# Altium PCB PCB1.PcbDoc
Units mil, origin at the board's own origin, x right, y up, seen from the top; angles counter-clockwise.
Board outline 4330.71 x 4330.71 mil, 2 copper layers (Top Layer, Bottom Layer); 102 components, 122 nets, 276 pads, 0 vias.
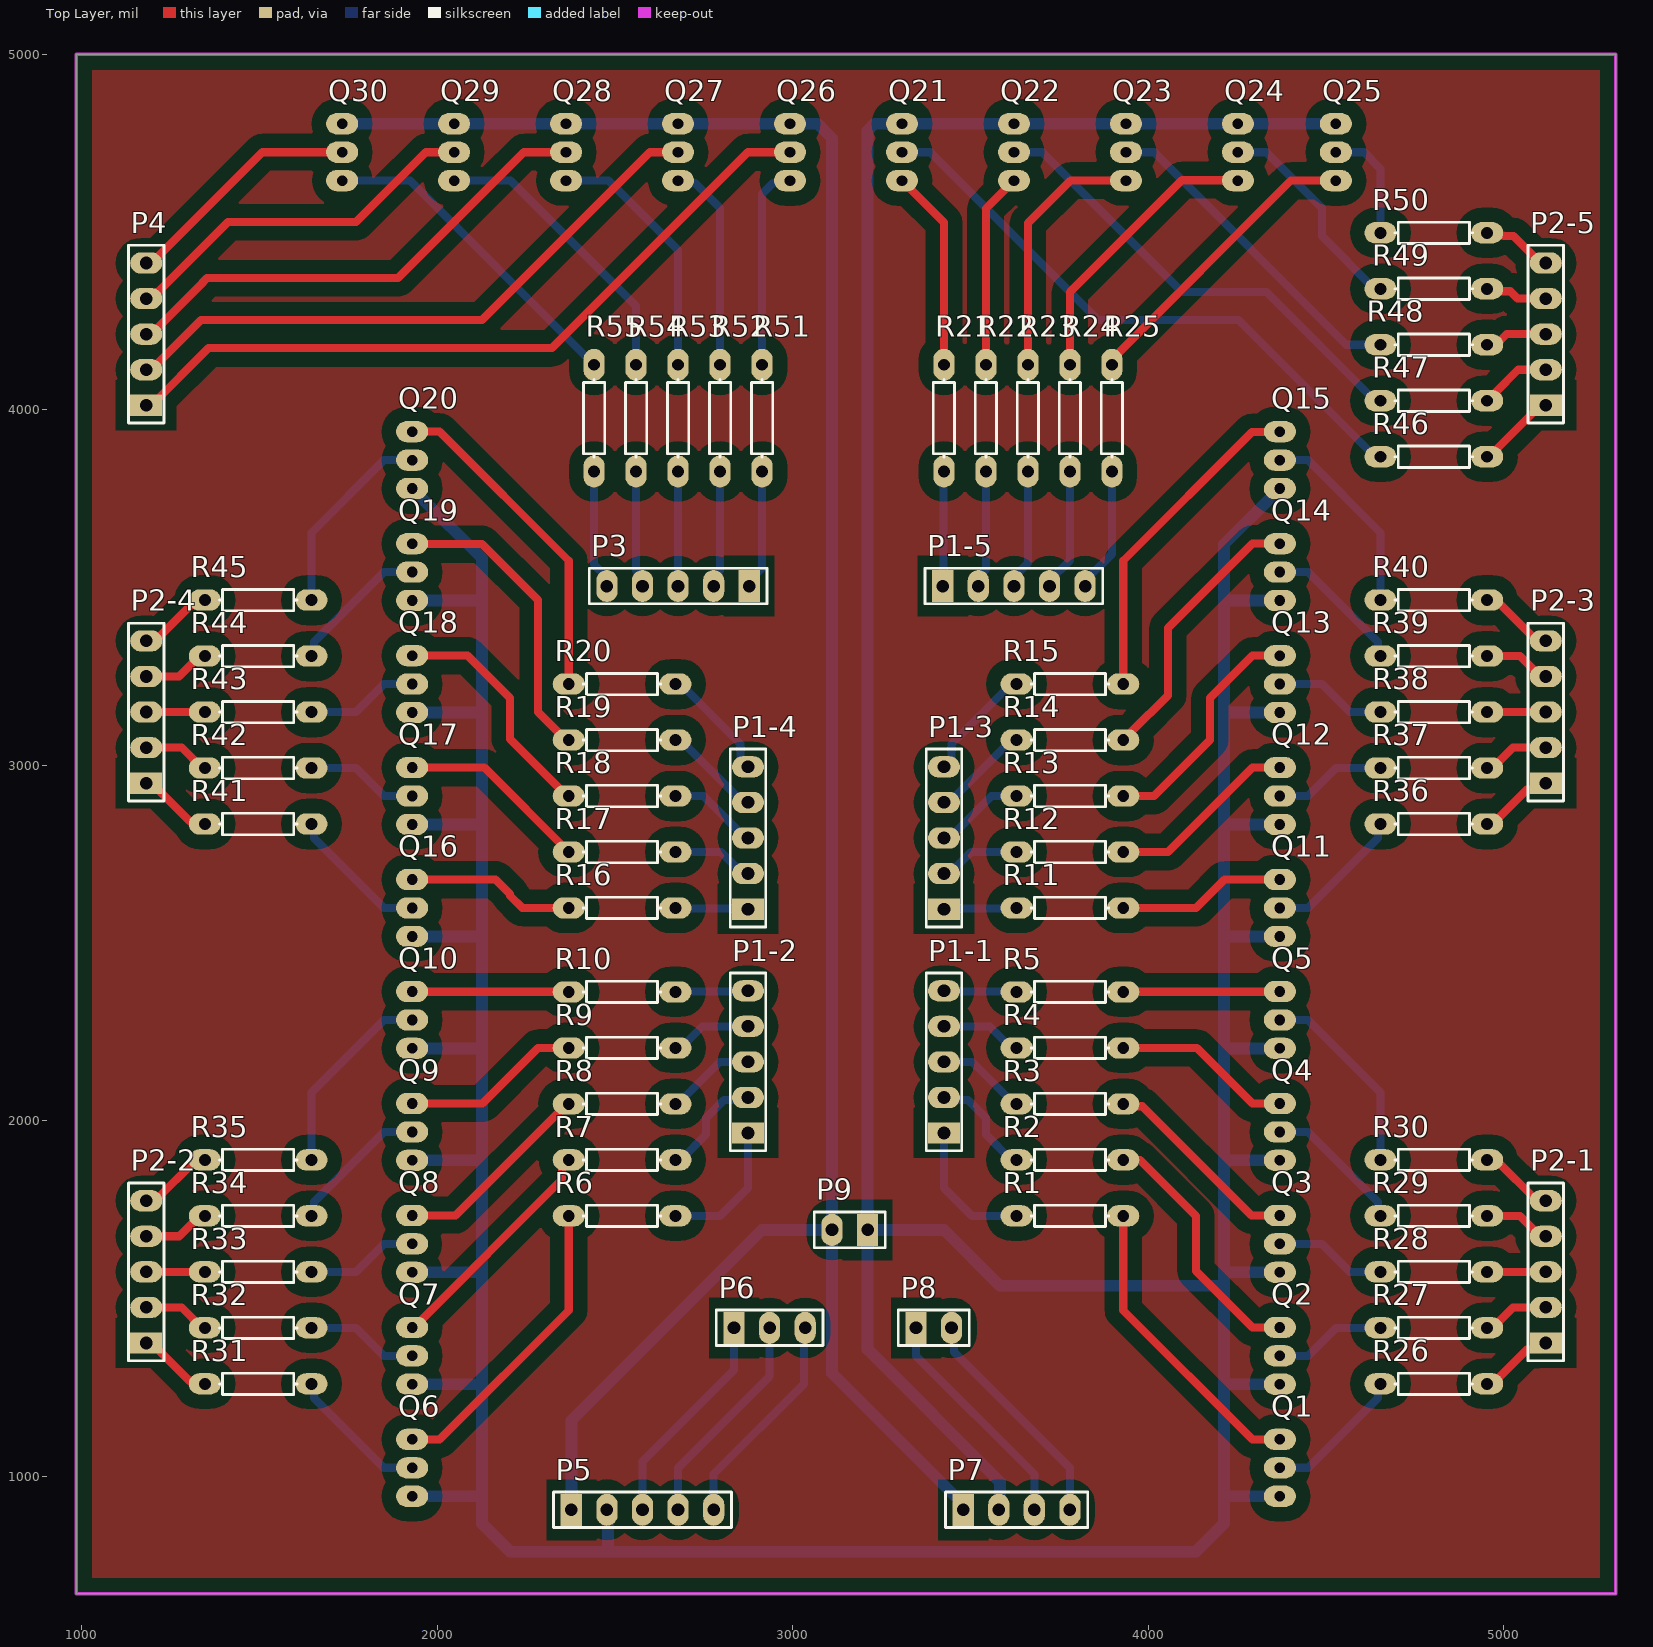
[diagram p0: Top Layer view]
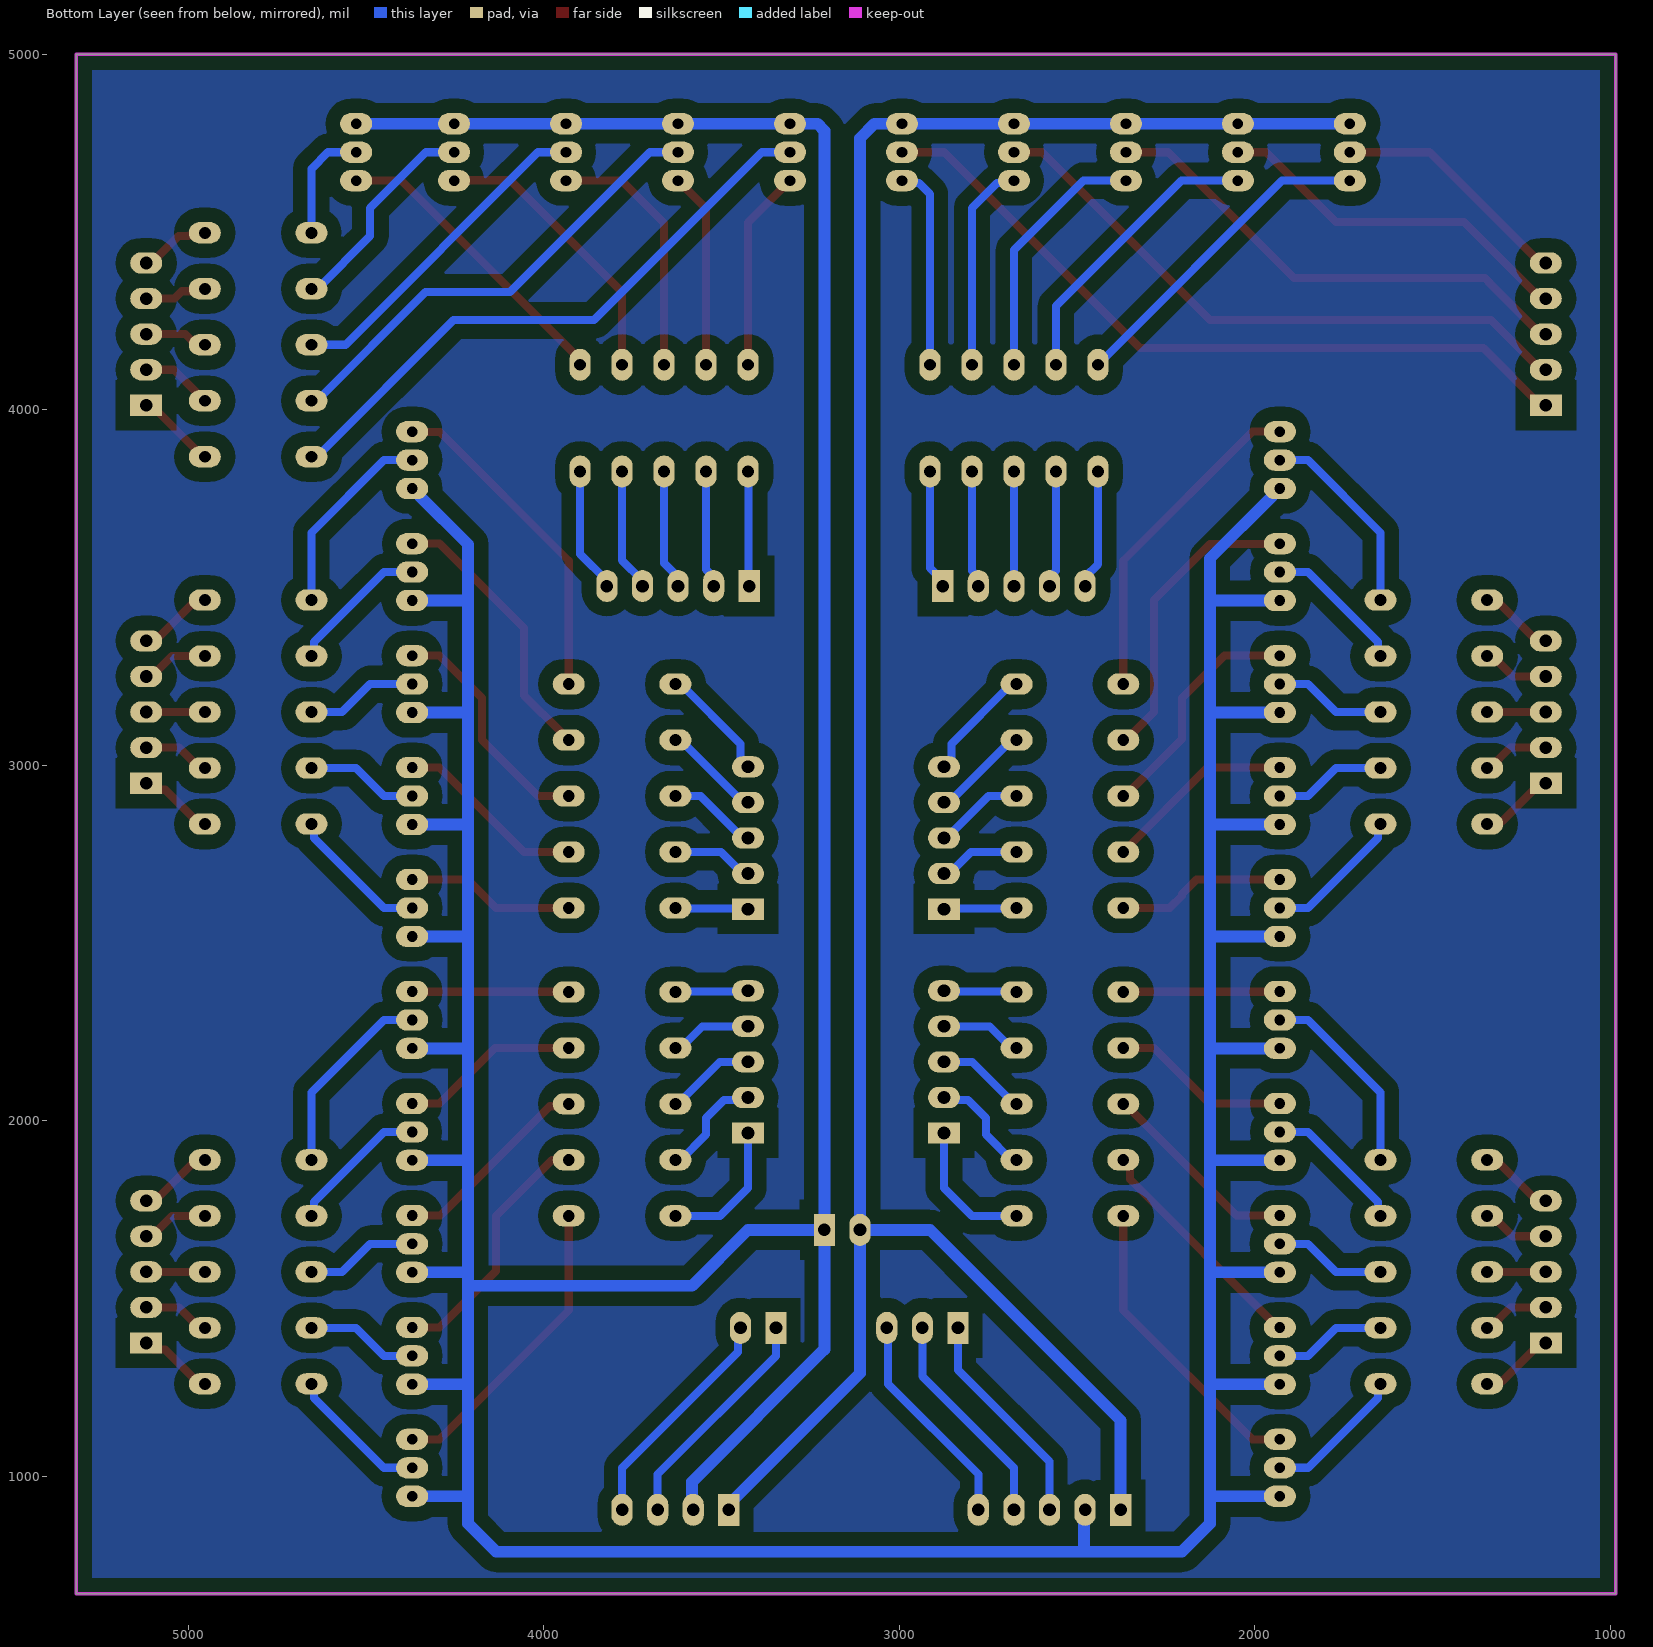
[diagram p1: Bottom Layer view, seen from below]

## Layer stack, top to bottom
Top Solder: solder mask 0.4, Solder Resist, Dk 3.5
Top Layer: signal copper 1.4
Dielectric 1: dielectric 12.6, FR-4, Dk 4.8
Bottom Layer: signal copper 1.4
Bottom Solder: solder mask 0.4, Solder Resist, Dk 3.5

## Board outline
984.25,669.29 984.25,5000 5314.96,5000 5314.96,669.29

## Design rules (kind name [scope] priority, off if disabled: settings)
Clearance poly [InPolygon] p1: gap=40 ignorepadtopadclearanceinfootprint=FALSE
Clearance [All] p2: gap=0 ignorepadtopadclearanceinfootprint=FALSE
PolygonConnect [All] p1: connectstyle=Relief reliefconductorwidth=10 reliefentries=4 polygonreliefangle="90 Angle" airgapwidth=10
RoutingVias [All] p1: holewidth=28 width=50 viastyle="Through Hole" minholewidth=28 minwidth=50 maxholewidth=28 maxwidth=50
SolderMaskExpansion [All] p1: expansion=4
Width Width_VCC [InNet('VCC')] p1: maxlimit=35 minlimit=30 preferedwidth=33 minimp=50.000000 maximp=50.000000 favimp=50.000000
Width Width_GND [InNet('GND')] p2: maxlimit=35 minlimit=30 preferedwidth=33 minimp=50.000000 maximp=50.000000 favimp=50.000000
Width Width_1 [All] p3: maxlimit=25 minlimit=21 preferedwidth=23 minimp=50.000000 maximp=50.000000 favimp=50.000000
30 further rules are at their usual default settings.

## Components (designator, comment, footprint, x,y, rotation, side; value= is the part's Value field where it differs from the comment)
P1-1 "Header 5" HDR1X5 3425.2,1965.35 r90 top
P1-2 "Header 5" HDR1X5 2874.02,1965.35 r90 top
P1-3 "Header 5" HDR1X5 3425.2,2595.28 r90 top
P1-4 "Header 5" HDR1X5 2874.02,2595.28 r90 top
P1-5 "Header 5" HDR1X5 3422.05,3503.94 r0 top
P2-1 "Header 5" HDR1X5 5118.11,1374.8 r90 top
P2-2 "Header 5" HDR1X5 1181.1,1374.8 r90 top
P2-3 "Header 5" HDR1X5 5118.11,2949.61 r90 top
P2-4 "Header 5" HDR1X5 1181.1,2949.61 r90 top
P2-5 "Header 5" HDR1X5 5118.11,4012.6 r90 top
P3 "Header 5" HDR1X5 2877.17,3503.94 r180 top
P4 "Header 5" HDR1X5 1181.1,4012.6 r90 top
P5 "Header 5" HDR1X5 2377.17,905.51 r0 top
P6 "Header 3" HDR1X3 2834.65,1417.32 r0 top
P7 "Header 4" HDR1X4 3479.53,905.51 r0 top
P8 "Header 2" HDR1X2 3346.46,1417.32 r0 top
P9 "Header 2" HDR1X2 3210.24,1692.91 r180 top
Q1 "2N3906" BJT 4310.08,1023.62 r0 top
Q2 "2N3906" BJT 4310.08,1338.58 r0 top
Q3 "2N3906" BJT 4310.08,1653.54 r0 top
Q4 "2N3906" BJT 4310.08,1968.5 r0 top
Q5 "2N3906" BJT 4310.08,2283.46 r0 top
Q6 "2N3906" BJT 1869.13,1023.62 r0 top
Q7 "2N3906" BJT 1869.13,1338.58 r0 top
Q8 "2N3906" BJT 1869.13,1653.54 r0 top
Q9 "2N3906" BJT 1869.13,1968.5 r0 top
Q10 "2N3906" BJT 1869.13,2283.46 r0 top
Q11 "2N3906" BJT 4310.08,2598.43 r0 top
Q12 "2N3906" BJT 4310.08,2913.39 r0 top
Q13 "2N3906" BJT 4310.08,3228.35 r0 top
Q14 "2N3906" BJT 4310.08,3543.31 r0 top
Q15 "2N3906" BJT 4310.08,3858.27 r0 top
Q16 "2N3906" BJT 1869.13,2598.43 r0 top
Q17 "2N3906" BJT 1869.13,2913.39 r0 top
Q18 "2N3906" BJT 1869.13,3228.35 r0 top
Q19 "2N3906" BJT 1869.13,3543.31 r0 top
Q20 "2N3906" BJT 1869.13,3858.27 r0 top
Q21 "2N3906" BJT 3367.09,4724.41 r180 top
Q22 "2N3906" BJT 3682.05,4724.41 r180 top
Q23 "2N3906" BJT 3997.01,4724.41 r180 top
Q24 "2N3906" BJT 4311.97,4724.41 r180 top
Q25 "2N3906" BJT 4587.56,4724.41 r180 top
Q26 "NPN" BJT 3052.13,4724.41 r180 top
Q27 "NPN" BJT 2737.17,4724.41 r180 top
Q28 "NPN" BJT 2422.21,4724.41 r180 top
Q29 "NPN" BJT 2107.24,4724.41 r180 top
Q30 "NPN" BJT 1792.28,4724.41 r180 top
R1 "Res1" AXIAL-0.3 3779.53,1732.28 r0 top value=1K
R2 "Res1" AXIAL-0.3 3779.53,1889.76 r0 top value=1K
R3 "Res1" AXIAL-0.3 3779.53,2047.24 r0 top value=1K
R4 "Res1" AXIAL-0.3 3779.53,2204.72 r0 top value=1K
R5 "Res1" AXIAL-0.3 3779.53,2362.2 r0 top value=1K
R6 "Res1" AXIAL-0.3 2519.69,1732.28 r180 top value=1K
R7 "Res1" AXIAL-0.3 2519.69,1889.76 r180 top value=1K
R8 "Res1" AXIAL-0.3 2519.69,2047.24 r180 top value=1K
R9 "Res1" AXIAL-0.3 2519.69,2204.72 r180 top value=1K
R10 "Res1" AXIAL-0.3 2519.69,2362.2 r180 top value=1K
R11 "Res1" AXIAL-0.3 3779.53,2598.43 r0 top value=1K
R12 "Res1" AXIAL-0.3 3779.53,2755.91 r0 top value=1K
R13 "Res1" AXIAL-0.3 3779.53,2913.39 r0 top value=1K
R14 "Res1" AXIAL-0.3 3779.53,3070.87 r0 top value=1K
R15 "Res1" AXIAL-0.3 3779.53,3228.35 r0 top value=1K
R16 "Res1" AXIAL-0.3 2519.69,2598.43 r180 top value=1K
R17 "Res1" AXIAL-0.3 2519.69,2755.91 r180 top value=1K
R18 "Res1" AXIAL-0.3 2519.69,2913.39 r180 top value=1K
R19 "Res1" AXIAL-0.3 2519.69,3070.87 r180 top value=1K
R20 "Res1" AXIAL-0.3 2519.69,3228.35 r180 top value=1K
R21 "Res1" AXIAL-0.3 3425.2,3976.38 r90 top value=1K
R22 "Res1" AXIAL-0.3 3543.31,3976.38 r90 top value=1K
R23 "Res1" AXIAL-0.3 3661.42,3976.38 r90 top value=1K
R24 "Res1" AXIAL-0.3 3779.53,3976.38 r90 top value=1K
R25 "Res1" AXIAL-0.3 3897.64,3976.38 r90 top value=1K
R26 "Res1" AXIAL-0.3 4803.15,1259.84 r180 top value=330
R27 "Res1" AXIAL-0.3 4803.15,1417.32 r180 top value=330
R28 "Res1" AXIAL-0.3 4803.15,1574.8 r180 top value=330
R29 "Res1" AXIAL-0.3 4803.15,1732.28 r180 top value=330
R30 "Res1" AXIAL-0.3 4803.15,1889.76 r180 top value=330
R31 "Res1" AXIAL-0.3 1496.06,1259.84 r0 top value=330
R32 "Res1" AXIAL-0.3 1496.06,1417.32 r0 top value=330
R33 "Res1" AXIAL-0.3 1496.06,1574.8 r0 top value=330
R34 "Res1" AXIAL-0.3 1496.06,1732.28 r0 top value=330
R35 "Res1" AXIAL-0.3 1496.06,1889.76 r0 top value=330
R36 "Res1" AXIAL-0.3 4803.15,2834.65 r180 top value=330
R37 "Res1" AXIAL-0.3 4803.15,2992.13 r180 top value=330
R38 "Res1" AXIAL-0.3 4803.15,3149.61 r180 top value=330
R39 "Res1" AXIAL-0.3 4803.15,3307.09 r180 top value=330
R40 "Res1" AXIAL-0.3 4803.15,3464.57 r180 top value=330
R41 "Res1" AXIAL-0.3 1496.06,2834.65 r0 top value=330
R42 "Res1" AXIAL-0.3 1496.06,2992.13 r0 top value=330
R43 "Res1" AXIAL-0.3 1496.06,3149.61 r0 top value=330
R44 "Res1" AXIAL-0.3 1496.06,3307.09 r0 top value=330
R45 "Res1" AXIAL-0.3 1496.06,3464.57 r0 top value=330
R46 "Res1" AXIAL-0.3 4803.15,3867.64 r180 top value=330
R47 "Res1" AXIAL-0.3 4803.15,4025.12 r180 top value=330
R48 "Res1" AXIAL-0.3 4803.15,4182.6 r180 top value=330
R49 "Res1" AXIAL-0.3 4803.15,4340.08 r180 top value=330
R50 "Res1" AXIAL-0.3 4803.15,4497.56 r180 top value=330
R51 "Res1" AXIAL-0.3 2913.39,3976.38 r90 top value=1K
R52 "Res1" AXIAL-0.3 2795.28,3976.38 r90 top value=1K
R53 "Res1" AXIAL-0.3 2677.17,3976.38 r90 top value=1K
R54 "Res1" AXIAL-0.3 2559.06,3976.38 r90 top value=1K
R55 "Res1" AXIAL-0.3 2440.94,3976.38 r90 top value=1K

## Footprints (in the part's own frame and the unit in brackets; to place one, negate y for a bottom-side part, rotate by r counter-clockwise, add the part's x,y. Pads: shape width x height; smd on the part's side, far side on the other; paste and mask are expansions set on the pad)
AXIAL-0.3 [mil] "Axial Device, Thru-Hole; 2 Leads; 0.3 in Pin Spacing"
  oval 90x60 hole 33.46: 1(-150,0) 2(150,0)
  silkscreen extent -109,-30 109,30
BJT [mil]
  oval 90x60 hole 30: 1(60,-80) 2(60,0) 3(60,80)
HDR1X2 [mil] "Connector; Header; 2 Position"
  rect 60x90 hole 35.43: 1(0,0)
  oval 60x90 hole 35.43: 2(100,0)
  silkscreen extent -50,-50 150,50
HDR1X3 [mil] "Connector; Header; 3 Position"
  rect 60x90 hole 35.43: 1(0,0)
  oval 60x90 hole 35.43: 2(100,0) 3(200,0)
  silkscreen extent -50,-50 250,50
HDR1X4 [mil] "Connector; Header; 4 Position"
  rect 60x90 hole 35.43: 1(0,0)
  oval 60x90 hole 35.43: 2(100,0) 3(200,0) 4(300,0)
  silkscreen extent -50,-50 350,50
HDR1X5 [mil] "Connector; Header; 5 Position"
  rect 60x90 hole 35.43: 1(0,0)
  oval 60x90 hole 35.43: 2(100,0) 3(200,0) 4(300,0) 5(400,0)
  silkscreen extent -50,-50 450,50

## Part data
P1-1 P1-2 P1-3 P1-4 P1-5 P2-1 P2-2 P2-3 P2-4 P2-5 P3 P4 P5: "Header, 5-Pin", LatestRevisionDate=17-Jul-2002, LatestRevisionNote="Re-released for DXP Platform.", Publisher="Altium Limited"
P6: "Header, 3-Pin", LatestRevisionDate=17-Jul-2002, LatestRevisionNote="Re-released for DXP Platform.", Publisher="Altium Limited"
P7: "Header, 4-Pin", LatestRevisionDate=17-Jul-2002, LatestRevisionNote="Re-released for DXP Platform.", Publisher="Altium Limited"
P8 P9: "Header, 2-Pin", LatestRevisionDate=17-Jul-2002, LatestRevisionNote="Re-released for DXP Platform.", Publisher="Altium Limited"
Q1 Q2 Q3 Q4 Q5 Q6 Q7 Q8 Q9 Q10 Q11 Q12 Q13 Q14 Q15 Q16 Q17 Q18 Q19 Q20 Q21 Q22 Q23 Q24 Q25: "PNP General Purpose Amplifier", ComponentLink1Description="Manufacturer Link", ComponentLink1URL=http://www.fairchildsemi.com/, ComponentLink2Description=Datasheet, ComponentLink2URL=http://www.fairchildsemi.com/ds/2N%2F2N3906.pdf, DatasheetVersion=1997, LatestRevisionDate=15-Jan-2003, LatestRevisionNote="PCB Footprint 'BCY-W3/D4.7' replaced", PackageDescription="TO, Flat Index; 3 In-Line, Axial Leads; Body Dia. 4.5mm; Leads 0.51 x 0.48 mm (max)", PackageReference=TO-92A, PackageVersion=Sep-1998, Published=8-Jun-2000, Publisher="Altium Limited"
Q26 Q27 Q28 Q29 Q30: "NPN Bipolar Transistor", Code_JEDEC=TO-226-AA, LatestRevisionDate=17-Jul-2002, LatestRevisionNote="Re-released for DXP Platform.", PackageDescription="TO, Flat Index; 3 In-Line, Axial Leads; Body Dia. 4.8mm; Leads 0.55 x 0.51 mm (max)", PackageReference=TO-226-AA, Published=8-Jun-2000, Publisher="Altium Limited"
R1 R2 R3 R4 R5 R6 R7 R8 R9 R10 R11 R12 R13 R14 R15 R16 R17 R18 R19 R20 R21 R22 R23 R24 R25 R26 R27 R28 R29 R30 R31 R32 R33 R34 R35 R36 R37 R38 R39 R40 R41 R42 R43 R44 R45 R46 R47 R48 R49 R50 R51 R52 R53 R54 R55: "Resistor", LatestRevisionDate=17-Jul-2002, LatestRevisionNote="Re-released for DXP Platform.", PackageDescription="Axial Device, Thru-Hole; 2 Leads; 0.3 in Pin Spacing", PackageReference=AXIAL-0.3, Published=8-Jun-2000, Publisher="Altium Limited"

## Nets (pads, with @x,y where several pads share a name; then routed paths per layer and width w, separated by ;. In a path a pad name is that pad's centre, name@x,y a point inside that pad or via, vN(x,y) a via of type N, cw(c..) or ccw(c..) an arc to the next point about the centre after c; other vN are vias at no path point)
1: P3.1 R51.1 | length 337.4
  Bottom Layer w23: P3.1 2877.17,3518.94 2913.39,3555.16 R51.1
1-1: P1-1.1 R1.1 | length 391.3
  Bottom Layer w23: P1-1.1 3425.2,1811.02 3503.94,1732.28 R1.1
1-2: P1-1.2 R2.1 | length 304.5
  Bottom Layer w23: P1-1.2 3432.28,2058.27 3492.91,2058.27 3543.31,2007.87 3543.31,1960.98 3614.53,1889.76 R2.1
1-3: P1-1.3 R3.1 | length 253.3
  Bottom Layer w23: P1-1.3 3504.7,2165.35 3622.81,2047.24 R3.1
1-4: P1-1.4 R4.1 | length 229.4
  Bottom Layer w23: P1-1.4 3553.9,2265.35 3614.53,2204.72 R4.1
1-5: P1-1.5 R5.1 | length 205.6
  Bottom Layer w23: P1-1.5 3426.77,2363.78 3627.95,2363.78 R5.1
2: P3.2 R52.1 | length 329.9
  Bottom Layer w23: P3.2 2777.17,3528.95 2795.28,3547.06 R52.1
2-1: P1-2.1 R6.1 | length 391.3
  Bottom Layer w23: R6.1 2795.28,1732.28 2874.02,1811.02 P1-2.1
2-2: P1-2.2 R7.1 | length 304.5
  Bottom Layer w23: R7.1 2684.69,1889.76 2755.91,1960.98 2755.91,2007.87 2806.31,2058.27 2866.94,2058.27 P1-2.2
2-3: P1-2.3 R8.1 | length 253.3
  Bottom Layer w23: R8.1 2676.41,2047.24 2794.52,2165.35 P1-2.3
2-4: P1-2.4 R9.1 | length 229.4
  Bottom Layer w23: R9.1 2684.69,2204.72 2745.32,2265.35 P1-2.4
2-5: P1-2.5 R10.1 | length 205.6
  Bottom Layer w23: R10.1 2671.26,2363.78 2872.44,2363.78 P1-2.5
3: P3.3 R53.1 | length 322.4
  Bottom Layer w23: P3.3 R53.1
3-1: P1-3.1 R11.1 | length 205.6
  Bottom Layer w23: P1-3.1 3426.77,2596.85 3627.95,2596.85 R11.1
3-2: P1-3.2 R12.1 | length 229.4
  Bottom Layer w23: P1-3.2 3440.2,2695.28 3500.83,2755.91 R12.1
3-3: P1-3.3 R13.1 | length 253.3
  Bottom Layer w23: P1-3.3 3440.2,2795.28 3558.31,2913.39 R13.1
3-4: P1-3.4 R14.1 | length 277.1
  Bottom Layer w23: P1-3.4 3439.57,2895.28 3615.16,3070.87 R14.1
3-5: P1-3.5 R15.1 | length 328.6
  Bottom Layer w23: P1-3.5 3428.87,2995.28 3445.96,3012.37 3445.96,3059.78 3614.53,3228.35 R15.1
4: P3.4 R54.1 | length 329.9
  Bottom Layer w23: R54.1 2559.06,3547.06 2577.17,3528.95 P3.4
4-1: P1-4.1 R16.1 | length 205.6
  Bottom Layer w23: R16.1 2671.26,2596.85 2872.44,2596.85 P1-4.1
4-2: P1-4.2 R17.1 | length 229.4
  Bottom Layer w23: R17.1 2798.39,2755.91 2859.02,2695.28 P1-4.2
4-3: P1-4.3 R18.1 | length 253.3
  Bottom Layer w23: R18.1 2749.19,2913.39 2867.3,2795.28 P1-4.3
4-4: P1-4.4 R19.1 | length 277.1
  Bottom Layer w23: R19.1 2684.06,3070.87 2859.65,2895.28 P1-4.4
4-5: P1-4.5 R20.1 | length 328.6
  Bottom Layer w23: R20.1 2684.69,3228.35 2853.26,3059.78 2853.26,3012.37 2870.35,2995.28 P1-4.5
5: P3.5 R55.1 | length 337.4
  Bottom Layer w23: R55.1 2440.95,3565.17 2477.17,3528.95 P3.5
5-1: P1-5.1 R21.1 | length 323.7
  Bottom Layer w23: P1-5.1 3423.62,3505.51 3423.62,3824.8 R21.1
5-2: P1-5.2 R22.1 | length 331.2
  Bottom Layer w23: P1-5.2 3522.05,3528.95 3543.31,3550.21 R22.1
5-3: P1-5.3 R23.1 | length 338.7
  Bottom Layer w23: P1-5.3 3622.05,3528.95 3661.42,3568.32 R23.1
5-4: P1-5.4 R24.1 | length 346.2
  Bottom Layer w23: P1-5.4 3722.05,3518.94 3779.53,3576.42 R24.1
5-5: P1-5.5 R25.1 | length 353.8
  Bottom Layer w23: P1-5.5 3822.05,3518.94 3897.64,3594.53 R25.1
control1: P5.3 P6.1 | length 618.5
  Bottom Layer w23: P5.3 2577.17,1041.73 2834.65,1299.21 P6.1
control2: P5.4 P6.2 | length 618.5
  Bottom Layer w23: P5.4 2677.17,1023.62 2934.65,1281.1 P6.2
control3: P5.5 P6.3 | length 618.5
  Bottom Layer w23: P5.5 2777.17,1005.51 3031.5,1259.84 3031.5,1414.17 P6.3
control4: P7.3 P8.1 | length 649.8
  Bottom Layer w23: P8.1 3346.46,1338.58 3679.53,1005.51 P7.3
control5: P7.4 P8.2 | length 649.8
  Bottom Layer w23: P8.2 3453.54,1410.24 3453.54,1349.61 3779.53,1023.62 P7.4
GND: P5.1 P7.1 P9.2 Q26.1 Q27.1 Q28.1 Q29.1 Q30.1 | length 6612.4
  Bottom Layer w33: Q30.1 Q29.1 Q28.1 Q27.1 Q26.1 3069.61,4804.41 3110.24,4763.78 P9.2 ; P5.1 2377.17,1156.69 2913.39,1692.91 P9.2 ; P7.1 3479.53,920.51 3110.24,1289.8 P9.2
NetQ1_2: Q1.3 R1.2 | length 856.5
  Top Layer w23: R1.2 3929.53,1466.69 4292.6,1103.62 Q1.3
NetQ1_3: Q1.2 R26.2 | length 399.6
  Bottom Layer w23: Q1.2 4448.82,1023.62 4645.67,1220.47 4645.67,1252.36 R26.2
NetQ2_2: Q2.3 R2.2 | length 726.5
  Top Layer w23: R2.2 3976.38,1889.76 4133.86,1732.28 4133.86,1577.32 4292.6,1418.58 Q2.3
NetQ2_3: Q2.2 R27.2 | length 315.7
  Bottom Layer w23: Q2.2 4448.82,1338.58 4527.56,1417.32 R27.2
NetQ3_2: Q3.3 R3.2 | length 570.5
  Top Layer w23: R3.2 3936.21,2040.56 3983.06,2040.56 4290.08,1733.54 Q3.3
NetQ3_3: Q3.2 R28.2 | length 315.7
  Bottom Layer w23: Q3.2 4448.82,1653.54 4488.19,1653.54 4566.93,1574.8 R28.2@4653.15,1574.8
NetQ4_2: Q4.3 R4.2 | length 505.3
  Top Layer w23: R4.2 4136.38,2204.72 4292.6,2048.5 Q4.3
NetQ4_3: Q4.2 R29.2 | length 399.6
  Bottom Layer w23: Q4.2 4448.82,1968.5 4645.67,1771.65 4645.67,1739.76 R29.2
NetQ5_2: Q5.3 R5.2 | length 441.1
  Top Layer w23: R5.2 3930.16,2362.83 4369.45,2362.83 Q5.3
NetQ5_3: Q5.2 R30.2 | length 557.1
  Bottom Layer w23: Q5.2 4448.82,2283.46 4653.15,2079.13 R30.2
NetQ6_2: Q6.3 R6.2 | length 856.5
  Top Layer w23: Q6.3 2006.61,1103.62 2369.69,1466.69 R6.2
NetQ6_3: Q6.2 R31.2 | length 399.6
  Bottom Layer w23: R31.2 1653.54,1252.36 1653.54,1220.47 1850.39,1023.62 Q6.2
NetQ7_2: Q7.3 R7.2 | length 657.6
  Top Layer w23: Q7.3 1934.12,1418.58 2350.82,1835.28 2350.82,1872.67 2367.91,1889.76 R7.2
NetQ7_3: Q7.2 R32.2 | length 315.7
  Bottom Layer w23: R32.2 1771.65,1417.32 1850.39,1338.58 Q7.2
NetQ8_2: Q8.3 R8.2 | length 570.5
  Top Layer w23: Q8.3 2051,1733.54 2364.7,2047.24 R8.2
NetQ8_3: Q8.2 R33.2 | length 315.7
  Bottom Layer w23: R33.2 1771.65,1574.8 1850.39,1653.54 Q8.2
NetQ9_2: Q9.3 R9.2 | length 505.3
  Top Layer w23: Q9.3 2127.24,2048.5 2283.46,2204.72 R9.2
NetQ9_3: Q9.2 R34.2 | length 399.6
  Bottom Layer w23: R34.2 1653.54,1739.77 1653.54,1771.65 1850.39,1968.5 Q9.2
NetQ10_2: Q10.3 R10.2 | length 441.1
  Top Layer w23: Q10.3 1929.76,2362.83 2369.06,2362.83 R10.2
NetQ10_3: Q10.2 R35.2 | length 557.1
  Bottom Layer w23: R35.2 1646.06,2079.13 1850.39,2283.46 Q10.2
NetQ11_2: Q11.3 R11.2 | length 473.7
  Top Layer w23: R11.2 4133.86,2598.43 4213.86,2678.43 Q11.3
NetQ11_3: Q11.2 R36.2 | length 399.6
  Bottom Layer w23: Q11.2 4448.82,2598.43 4645.67,2795.28 4645.67,2827.17 R36.2
NetQ12_2: Q12.3 R12.2 | length 538.9
  Top Layer w23: R12.2 4055.12,2755.91 4292.6,2993.39 Q12.3
NetQ12_3: Q12.2 R37.2 | length 315.7
  Bottom Layer w23: Q12.2 4448.82,2913.39 4527.56,2992.13 R37.2
NetQ13_2: Q13.3 R13.2 | length 673.3
  Top Layer w23: R13.2 4015.75,2913.39 4173.23,3070.87 4173.23,3188.98 4292.6,3308.35 Q13.3
NetQ13_3: Q13.2 R38.2 | length 315.7
  Bottom Layer w23: Q13.2 4448.82,3228.35 4488.19,3228.35 4566.93,3149.61 R38.2@4653.15,3149.61
NetQ14_2: Q14.3 R14.2 | length 783.2
  Top Layer w23: R14.2 3934.52,3070.87 3951.61,3087.96 3951.61,3092.95 4055.12,3196.46 4055.12,3385.83 4292.6,3623.31 Q14.3
NetQ14_3: Q14.2 R39.2 | length 399.6
  Bottom Layer w23: Q14.2 4448.82,3543.31 4645.67,3346.46 4645.67,3314.57 R39.2
NetQ15_2: Q15.3 R15.2 | length 937.8
  Top Layer w23: R15.2 3929.53,3575.2 4291.34,3937.01 4368.82,3937.01 Q15.3
NetQ15_3: Q15.2 R40.2 | length 557.1
  Bottom Layer w23: Q15.2 4448.82,3858.27 4653.15,3653.94 R40.2
NetQ16_2: Q16.3 R16.2 | length 476.6
  Top Layer w23: Q16.3 2164.09,2678.43 2204.72,2637.8 2204.72,2632.81 2239.11,2598.43 R16.2
NetQ16_3: Q16.2 R41.2 | length 399.6
  Bottom Layer w23: R41.2 1653.54,2827.16 1653.54,2795.28 1850.39,2598.43 Q16.2
NetQ17_2: Q17.3 R17.2 | length 538.9
  Top Layer w23: Q17.3 2132.21,2993.39 R17.2
NetQ17_3: Q17.2 R42.2 | length 315.7
  Bottom Layer w23: R42.2 1771.65,2992.13 1850.39,2913.39 Q17.2
NetQ18_2: Q18.3 R18.2 | length 671.9
  Top Layer w23: Q18.3 2085.35,3308.35 2204.72,3188.98 2204.72,3073.36 2260.46,3017.62 2364.7,2913.39 R18.2
NetQ18_3: Q18.2 R43.2 | length 315.7
  Bottom Layer w23: R43.2 1771.65,3149.61 1850.39,3228.35 Q18.2
NetQ19_2: Q19.3 R19.2 | length 853.9
  Top Layer w23: Q19.3 1930.39,3622.05 2125.98,3622.05 2283.46,3464.57 2283.46,3149.61 2362.2,3070.87 R19.2
NetQ19_3: Q19.2 R44.2 | length 399.6
  Bottom Layer w23: R44.2 1653.54,3314.57 1653.54,3346.46 1850.39,3543.31 Q19.2
NetQ20_2: Q20.3 R20.2 | length 937.8
  Top Layer w23: Q20.3 2006.61,3938.27 2369.69,3575.2 R20.2
NetQ20_3: Q20.2 R45.2 | length 557.1
  Bottom Layer w23: R45.2 1646.06,3653.94 1850.39,3858.27 Q20.2
NetQ21_2: Q21.3 R21.2 | length 569.9
  Top Layer w23: Q21.3 3312.07,4644.41 3329.17,4627.32 3329.17,4622.33 3425.2,4526.3 R21.2
NetQ21_3: Q21.2 R46.2 | length 1700.9
  Bottom Layer w23: Q21.2 3385.83,4724.41 3858.27,4251.97 4253.82,4251.97 4638.15,3867.64 R46.2
NetQ22_2: Q22.3 R22.2 | length 553.6
  Top Layer w23: R22.2 3543.31,4565.67 3599.97,4622.33 3599.97,4627.32 3617.06,4644.41 Q22.3
NetQ22_3: Q22.2 R47.2 | length 1320.8
  Bottom Layer w23: Q22.2 3700.79,4724.41 4094.49,4330.71 4332.56,4330.71 4638.15,4025.12 R47.2
NetQ23_2: Q23.3 R23.2 | length 723.7
  Top Layer w23: R23.2 3661.42,4525.04 3780.79,4644.41 Q23.3
NetQ23_3: Q23.2 R48.2 | length 940.6
  Bottom Layer w23: Q23.2 4015.75,4724.41 4557.56,4182.6 R48.2
NetQ24_2: Q24.3 R24.2 | length 807.8
  Top Layer w23: R24.2 3779.53,4330.71 4094.49,4645.67 4250.71,4645.67 Q24.3
NetQ24_3: Q24.2 R49.2 | length 606.5
  Bottom Layer w23: Q24.2 4330.71,4724.41 4488.19,4566.93 4488.19,4488.19 4636.3,4340.08 R49.2
NetQ25_2: Q25.3 R25.2 | length 853.3
  Top Layer w23: R25.2 3897.64,4141.38 4400.67,4644.41 Q25.3
NetQ25_3: Q25.2 R50.2 | length 325
  Bottom Layer w23: Q25.2 4606.3,4724.41 4653.15,4677.56 R50.2
NetQ26_2: Q26.3 R51.2 | length 574.4
  Bottom Layer w23: R51.2 2913.39,4606.3 2944.42,4637.33 2985.05,4637.33 Q26.3
NetQ27_2: Q27.3 R52.2 | length 590.8
  Bottom Layer w23: Q27.3 2684.24,4637.33 2724.87,4637.33 2795.28,4566.93 R52.2
NetQ28_2: Q28.3 R53.2 | length 718.4
  Bottom Layer w23: Q28.3 2481.57,4644.41 2677.16,4448.82 R53.2
NetQ29_2: Q29.3 R54.2 | length 823
  Bottom Layer w23: Q29.3 2205.98,4644.41 2559.06,4291.34 R54.2
NetQ30_2: Q30.3 R55.2 | length 926.2
  Bottom Layer w23: Q30.3 1922.91,4644.41 2418.87,4148.46 2423.85,4148.46 2440.95,4131.37 R55.2
NPN1: P4.1 Q26.2 | length 2105.9
  Top Layer w23: P4.1 1196.1,4012.6 1356.73,4173.23 2322.83,4173.23 2874.02,4724.41 Q26.2
NPN2: P4.2 Q27.2 | length 1749.5
  Top Layer w23: P4.2 1196.1,4112.6 1335.47,4251.97 2125.98,4251.97 2598.43,4724.41 Q27.2
NPN3: P4.3 Q28.2 | length 1394
  Top Layer w23: P4.3 1196.1,4212.6 1338.58,4355.08 1338.58,4356.61 1352.06,4370.08 1889.76,4370.08 2244.09,4724.41 Q28.2
NPN4: P4.4 Q29.2 | length 1036.7
  Top Layer w23: P4.4 1196.1,4312.6 1411.06,4527.56 1771.65,4527.56 1968.5,4724.41 Q29.2
NPN5: P4.5 Q30.2 | length 680.3
  Top Layer w23: P4.5 1196.1,4412.6 1507.91,4724.41 Q30.2
PNP1: P2-1.1 R26.1 | length 212.6
  Top Layer w23: R26.1 4968.15,1259.84 5064.61,1356.3 5099.61,1356.3 P2-1.1
PNP2: P2-1.2 R27.1 | length 188.8
  Top Layer w23: R27.1 4968.15,1417.32 5025.63,1474.8 P2-1.2
PNP3: P2-1.3 R28.1 | length 165
  Top Layer w23: R28.1 P2-1.3
PNP4: P2-1.4 R29.1 | length 188.8
  Top Layer w23: R29.1 5045.63,1732.28 5103.11,1674.8 P2-1.4
PNP5: P2-1.5 R30.1 | length 212.6
  Top Layer w23: R30.1 4978.15,1889.76 5093.11,1774.8 P2-1.5
PNP6: P2-2.1 R31.1 | length 212.6
  Top Layer w23: P2-2.1 1196.1,1374.8 1303.98,1266.92 1338.98,1266.92 R31.1
PNP7: P2-2.2 R32.1 | length 188.8
  Top Layer w23: P2-2.2 1281.1,1474.8 1338.58,1417.32 R32.1
PNP8: P2-2.3 R33.1 | length 165
  Top Layer w23: P2-2.3 R33.1
PNP9: P2-2.4 R34.1 | length 188.8
  Top Layer w23: P2-2.4 1273.58,1674.8 1331.06,1732.28 R34.1
PNP10: P2-2.5 R35.1 | length 212.6
  Top Layer w23: P2-2.5 1206.1,1774.8 1321.06,1889.76 R35.1
PNP11: P2-3.1 R36.1 | length 212.6
  Top Layer w23: R36.1 4968.15,2834.65 5064.61,2931.11 5099.61,2931.11 P2-3.1
PNP12: P2-3.2 R37.1 | length 188.8
  Top Layer w23: R37.1 4968.15,2992.13 5025.63,3049.61 P2-3.2
PNP13: P2-3.3 R38.1 | length 165
  Top Layer w23: R38.1 P2-3.3
PNP14: P2-3.4 R39.1 | length 188.8
  Top Layer w23: R39.1 5045.63,3307.09 5103.11,3249.61 P2-3.4
PNP15: P2-3.5 R40.1 | length 212.6
  Top Layer w23: R40.1 4978.15,3464.57 5093.11,3349.61 P2-3.5
PNP16: P2-4.1 R41.1 | length 212.6
  Top Layer w23: P2-4.1 1196.1,2949.61 1303.98,2841.73 1338.98,2841.73 R41.1
PNP17: P2-4.2 R42.1 | length 188.8
  Top Layer w23: P2-4.2 1281.1,3049.61 1338.58,2992.13 R42.1
PNP18: P2-4.3 R43.1 | length 165
  Top Layer w23: P2-4.3 R43.1
PNP19: P2-4.4 R44.1 | length 188.8
  Top Layer w23: P2-4.4 1273.58,3249.61 1331.06,3307.09 R44.1
PNP20: P2-4.5 R45.1 | length 212.6
  Top Layer w23: P2-4.5 1206.1,3349.61 1321.06,3464.57 R45.1
PNP21: P2-5.1 R46.1 | length 225
  Top Layer w23: R46.1 4958.15,3867.64 5103.11,4012.6 P2-5.1
PNP22: P2-5.2 R47.1 | length 204.1
  Top Layer w23: R47.1 4958.14,4025.12 4975.23,4042.21 4975.23,4047.2 5040.63,4112.6 P2-5.2
PNP23: P2-5.3 R48.1 | length 177.4
  Top Layer w23: R48.1 4978.16,4182.6 5008.16,4212.6 P2-5.3
PNP24: P2-5.4 R49.1 | length 176.3
  Top Layer w23: R49.1 4960.23,4333 5018.21,4333 5038.61,4312.6 P2-5.4
PNP25: P2-5.5 R50.1 | length 200.2
  Top Layer w23: R50.1 4960.23,4490.48 4997.71,4490.48 5000,4488.19 5027.52,4488.19 5103.11,4412.6 P2-5.5
VCC: P5.2 P7.2 P9.1 Q1.1 Q2.1 Q3.1 Q4.1 Q5.1 Q6.1 Q7.1 Q8.1 Q9.1 Q10.1 Q11.1 Q12.1 Q13.1 Q14.1 Q15.1 Q16.1 Q17.1 Q18.1 Q19.1 Q20.1 Q21.1 Q22.1 Q23.1 Q24.1 Q25.1 | length 17877.7
  Bottom Layer w33: Q6.1 2124.72,943.62 2125.98,944.88 ; Q7.1 2124.72,1258.58 2125.98,1259.84 ; Q8.1 2124.73,1573.54 2125.98,1574.8 ; Q9.1 2124.72,1888.5 2125.98,1889.76 ; Q10.1 2124.72,2203.46 2125.98,2204.72 ; Q16.1 2124.73,2518.43 2125.98,2519.68 ; Q17.1 2124.72,2833.39 2125.98,2834.65 ; Q18.1 2124.72,3148.35 2125.98,3149.61 ; Q19.1 2124.73,3463.31 2125.98,3464.57 ; Q20.1 1936.83,3778.27 1949.3,3765.8 1949.3,3758.1 2125.98,3581.42 2125.98,3464.57 ; P5.2 2480.32,902.36 2480.32,787.4 ; P7.2 3582.68,908.66 3582.68,984.25 3210.24,1356.69 P9.1 ; Q1.1 4213.86,943.62 4212.6,944.88 ; Q2.1 4213.86,1258.58 4212.6,1259.84 ; Q3.1 4213.86,1573.54 4212.6,1574.8 ; Q4.1 4213.86,1888.5 4212.6,1889.76 ; Q5.1 4213.86,2203.46 4212.6,2204.72 ; Q11.1 4213.86,2518.43 4212.6,2519.68 ; Q12.1 4213.86,2833.39 4212.6,2834.65 ; Q13.1 4213.86,3148.35 4212.6,3149.61 ; Q14.1 4213.86,3463.31 4212.6,3464.57 ; Q15.1 4362.38,3778.27 4349.91,3765.8 4349.91,3758.1 4212.6,3620.79 4212.6,3464.57 ; Q25.1 Q24.1 Q23.1 Q22.1 Q21.1 3229.61,4804.41 3210.24,4785.04 P9.1 ; 2125.98,944.88 2125.98,1259.84 ; 2125.98,944.88 2125.98,866.14 2204.72,787.4 2480.32,787.4 ; 2125.98,1259.84 2125.98,1574.8 ; 2125.98,1574.8 2125.98,1889.76 ; 2125.98,1889.76 2125.98,2204.72 ; 2125.98,2204.72 2125.98,2519.68 ; 2125.98,2519.68 2125.98,2834.65 ; 2125.98,2834.65 2125.98,3149.61 ; 2125.98,3149.61 2125.98,3464.57 ; 2480.32,787.4 4133.86,787.4 4212.6,866.14 4212.6,944.88 ; P9.1 3425.2,1692.91 3582.68,1535.43 4212.6,1535.43 ; 4212.6,944.88 4212.6,1259.84 ; 4212.6,1259.84 4212.6,1535.43 ; 4212.6,1535.43 4212.6,1574.8 ; 4212.6,1574.8 4212.6,1889.76 ; 4212.6,1889.76 4212.6,2204.72 ; 4212.6,2204.72 4212.6,2519.68 ; 4212.6,2519.68 4212.6,2834.65 ; 4212.6,2834.65 4212.6,3149.61 ; 4212.6,3149.61 4212.6,3464.57

## Polygon pours and split planes (outlines as drawn)
no net on Bottom Layer (solid, pour order 0): 984.25,5000 5314.96,5000 5314.96,669.29 984.25,669.29
no net on Bottom Layer (solid, pour order 4): 984.25,669.29
no net on Bottom Layer (solid, pour order 2): 6141.73,1299.21
no net on Top Layer (solid, pour order 6): 984.25,5000 5314.96,5000 5314.96,669.29 984.25,669.29

## Keep-outs
Keep-Out Layer:
  the board outline again, w10

## Dimensions
1181.1,1374.8 to 984.25,669.29 on Top Overlay
1181.1,1374.8 to 984.25,669.29 on Top Overlay
984.25,5000 to 984.25,669.29 on Top Overlay
984.25,5000 to 5314.96,5000 on Top Overlay
5118.11,4212.6 to 5118.11,3149.61 on Top Overlay
5118.11,3149.61 to 5118.11,1574.8 on Top Overlay
5118.11,1374.8 to 1181.1,1374.8 on Top Overlay